# Altium PCB PCB1.PcbDoc
Units mil, origin at the board's own origin, x right, y up, seen from the top; angles counter-clockwise.
Board outline 4180 x 3530 mil, 4 copper layers (Top Layer, Int1 (GND), Int2 (PWR), Bottom Layer), stack 53.912 mil thick; 26 components, 40 nets, 140 pads, 12 vias.
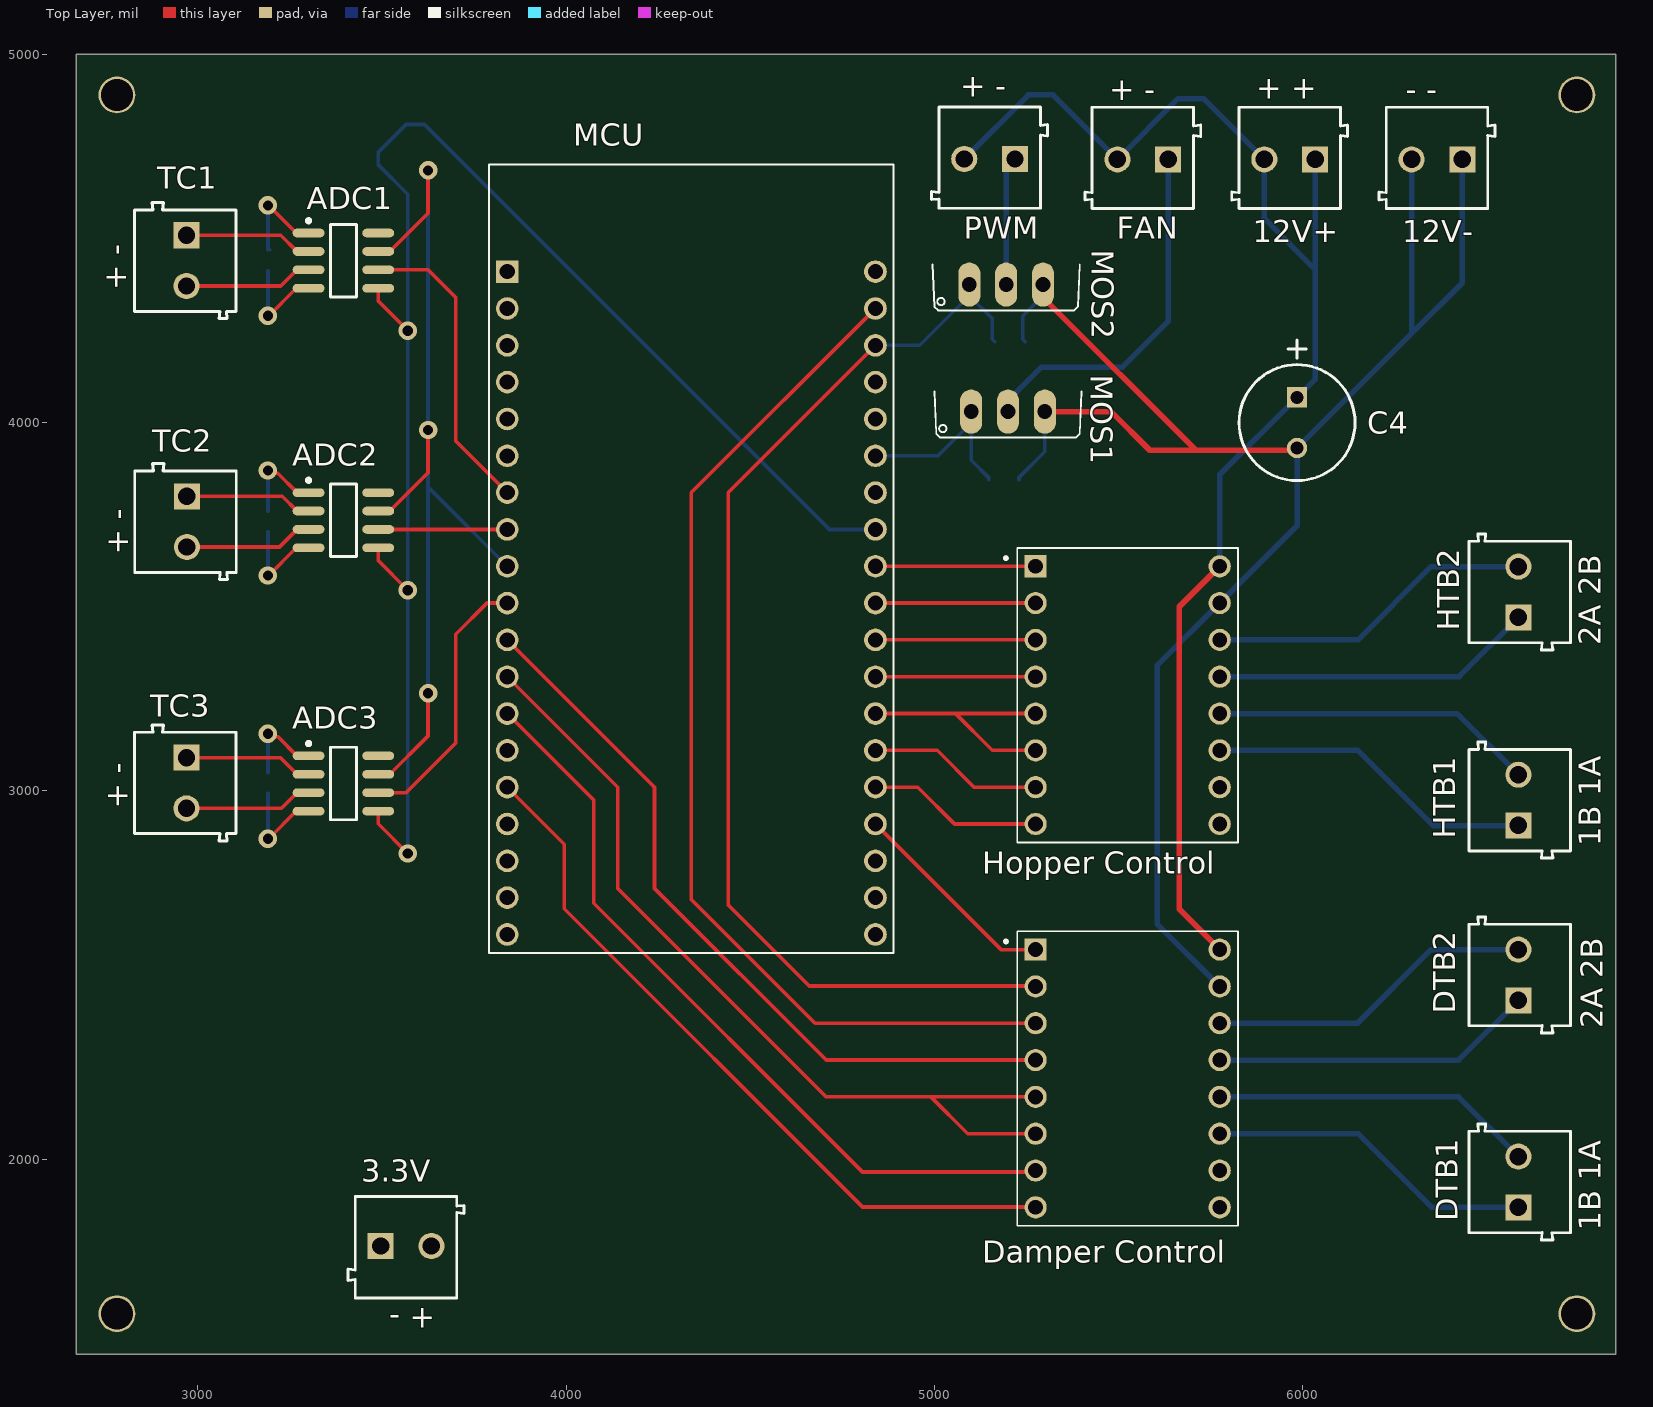
[diagram p0: Top Layer view]
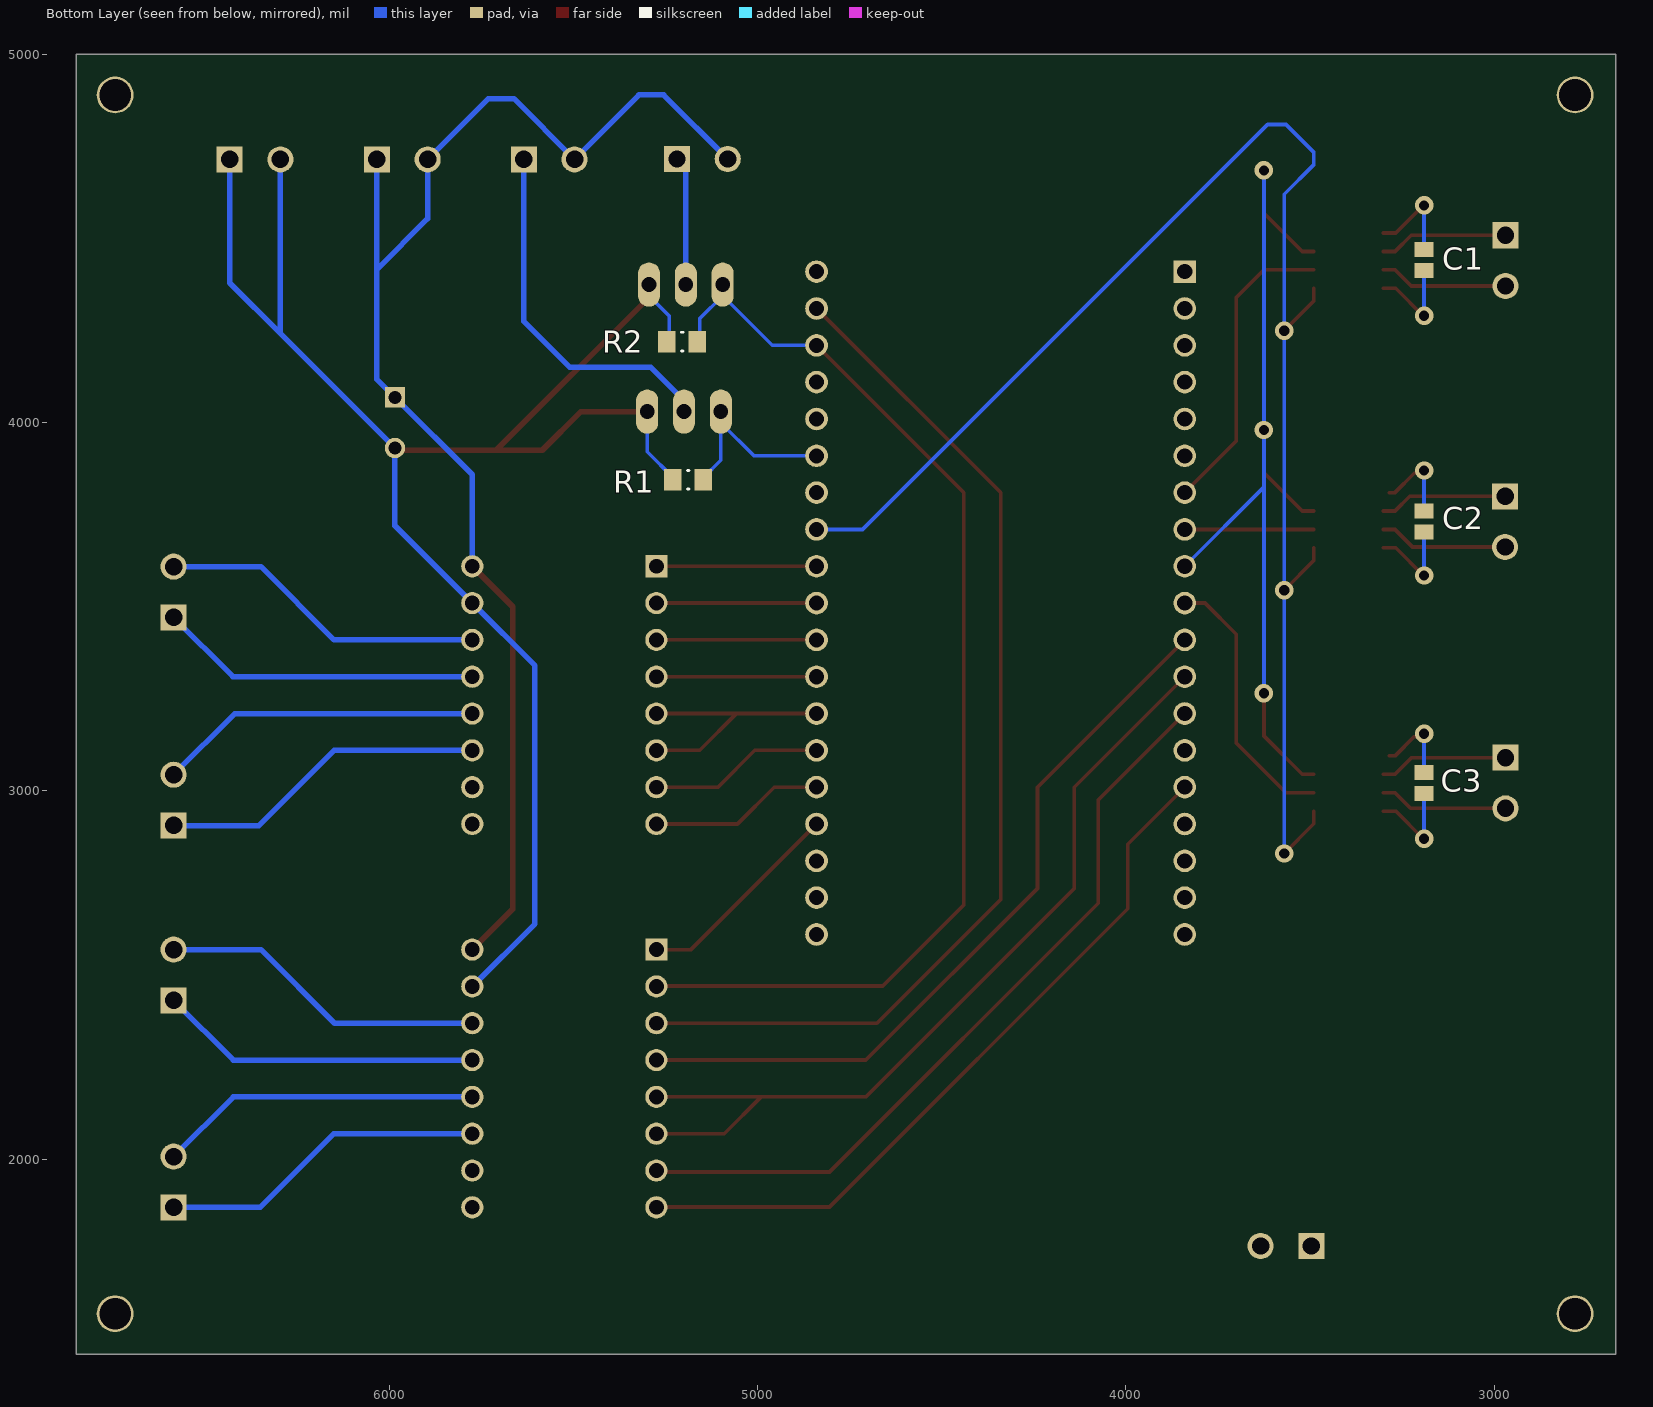
[diagram p1: Bottom Layer view, seen from below]
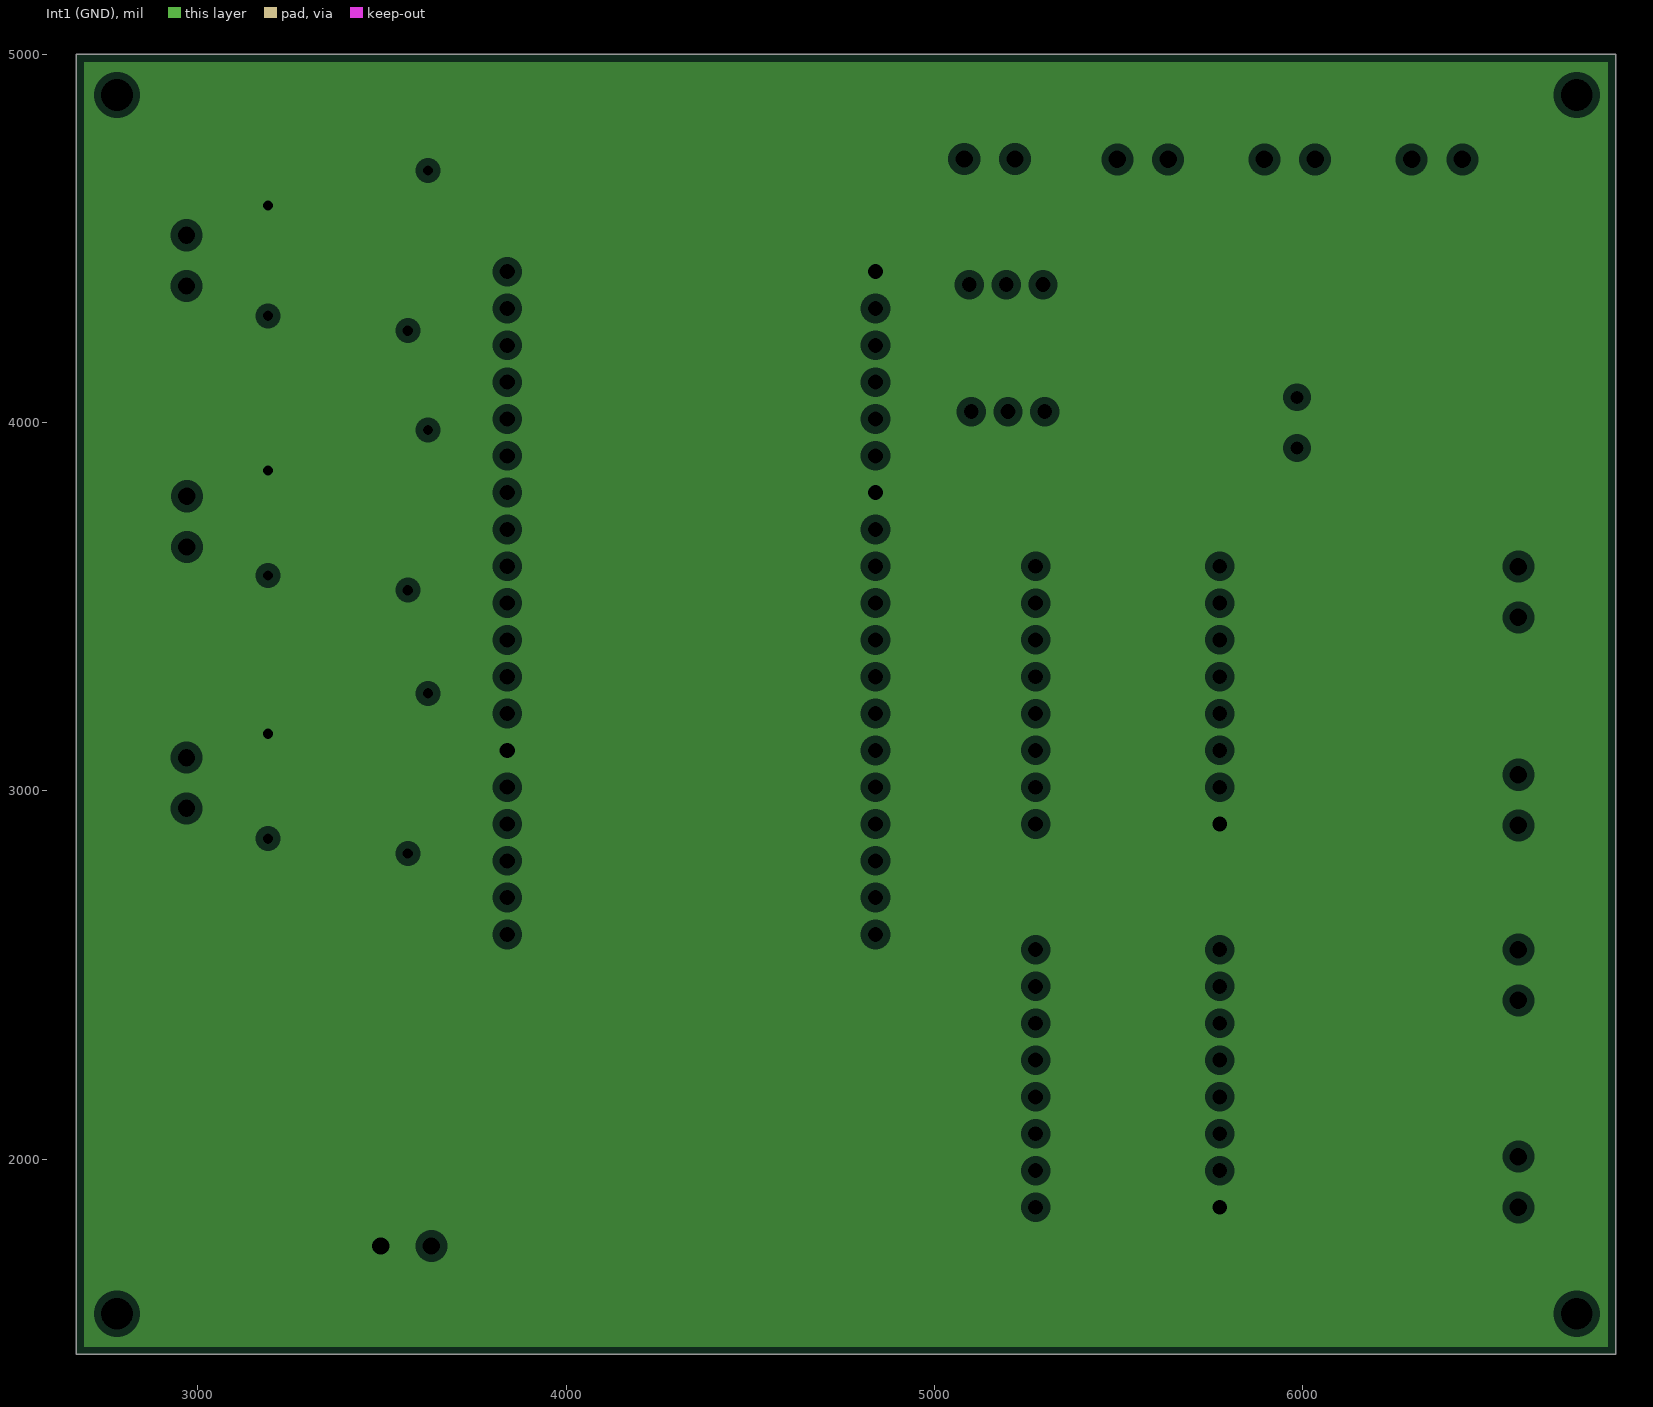
[diagram p2: Int1 (GND), clearances drawn from the general rule]
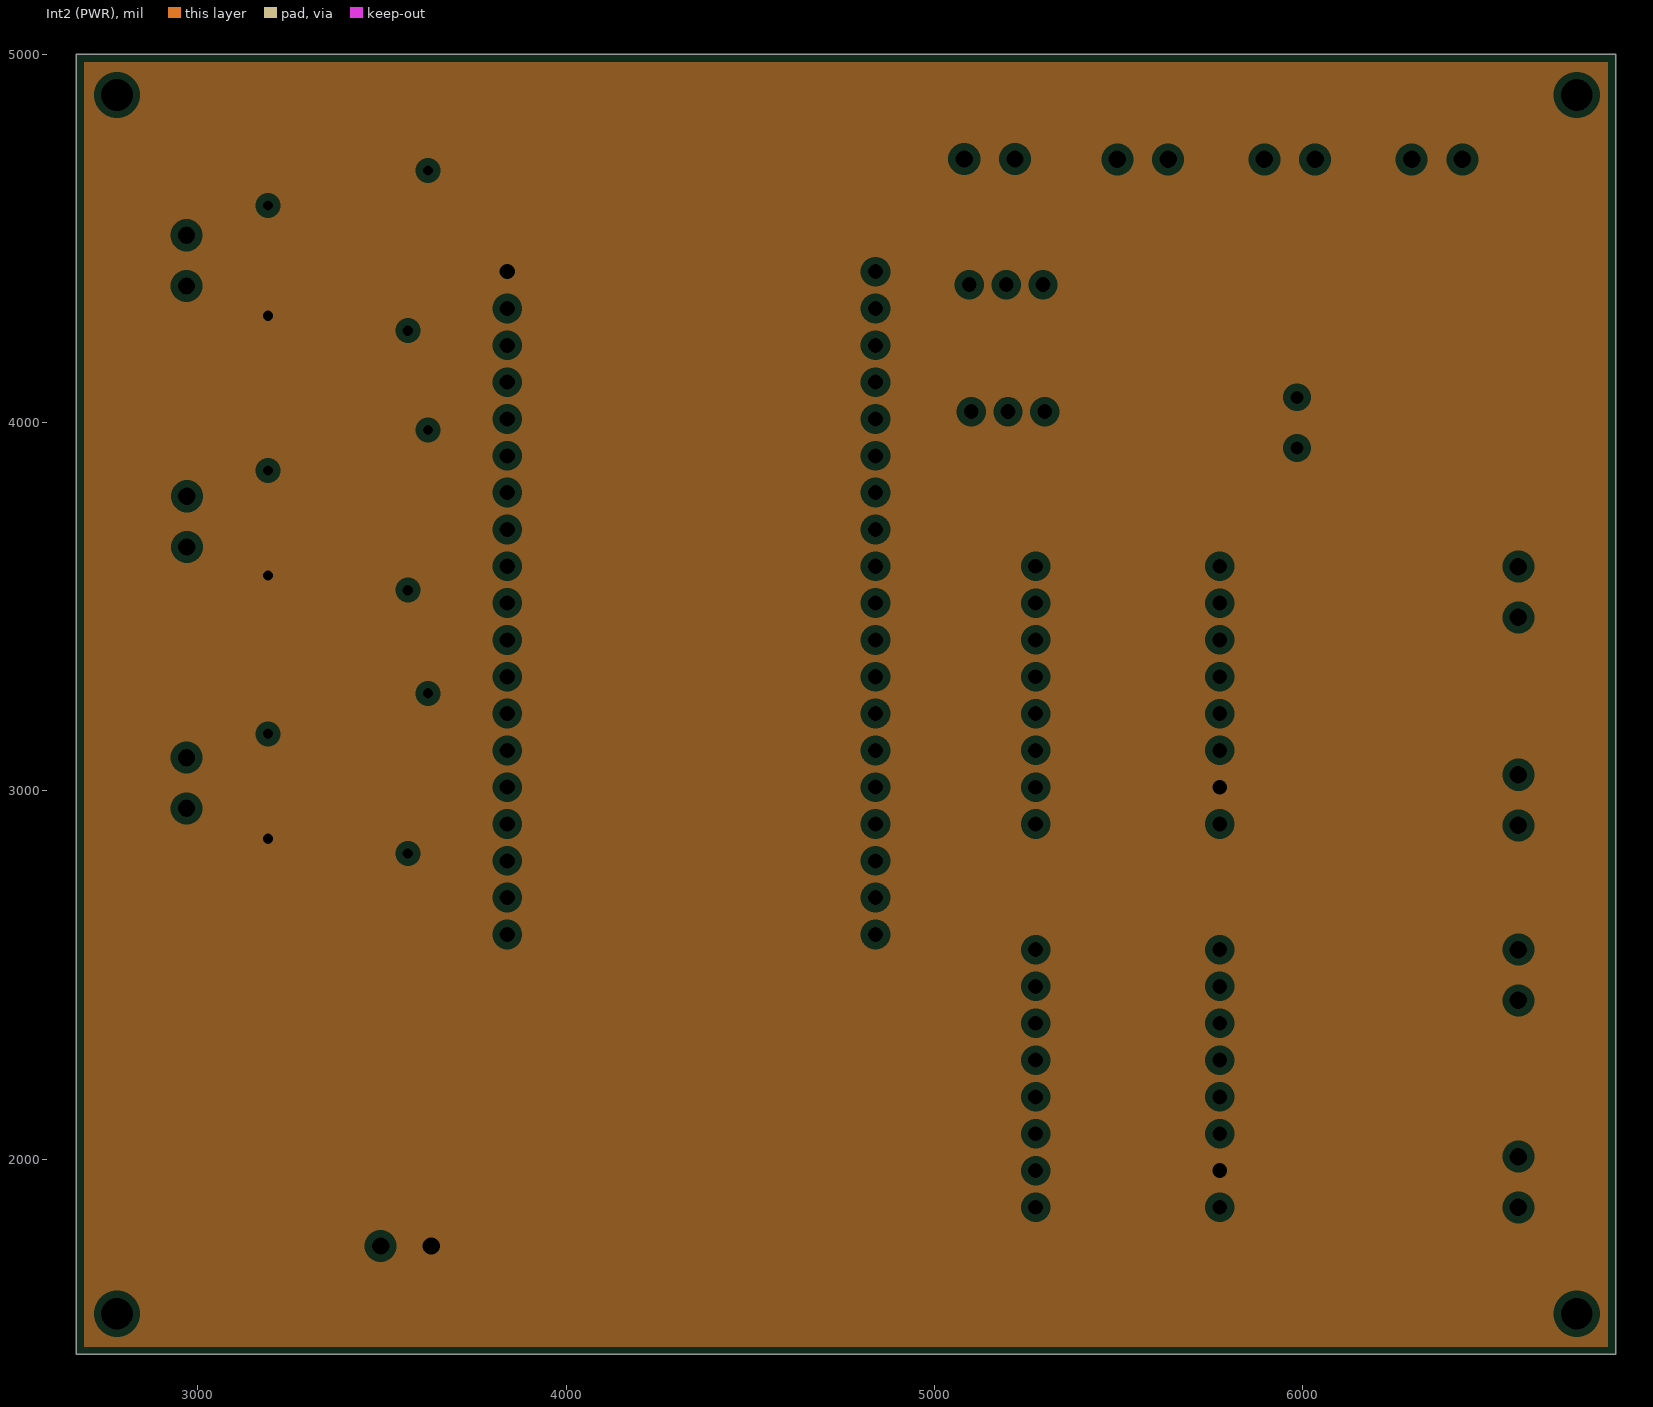
[diagram p3: Int2 (PWR), clearances drawn from the general rule]
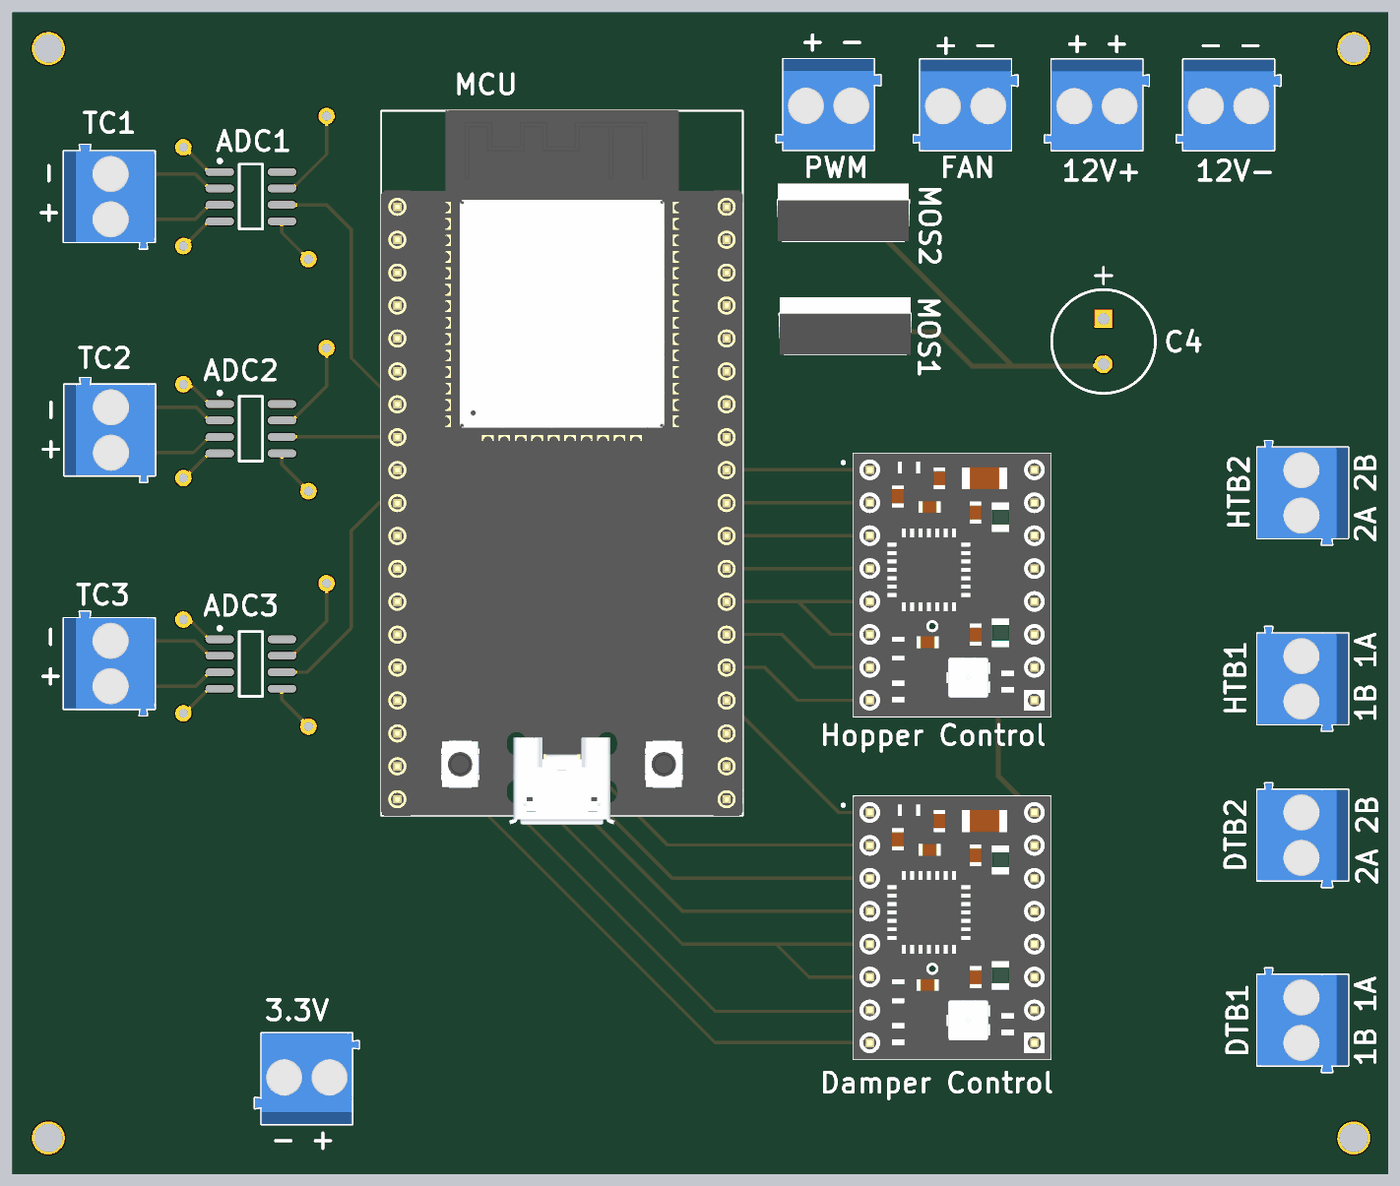
[diagram p4: 3D render of the assembled board from above, using the file's embedded part models]
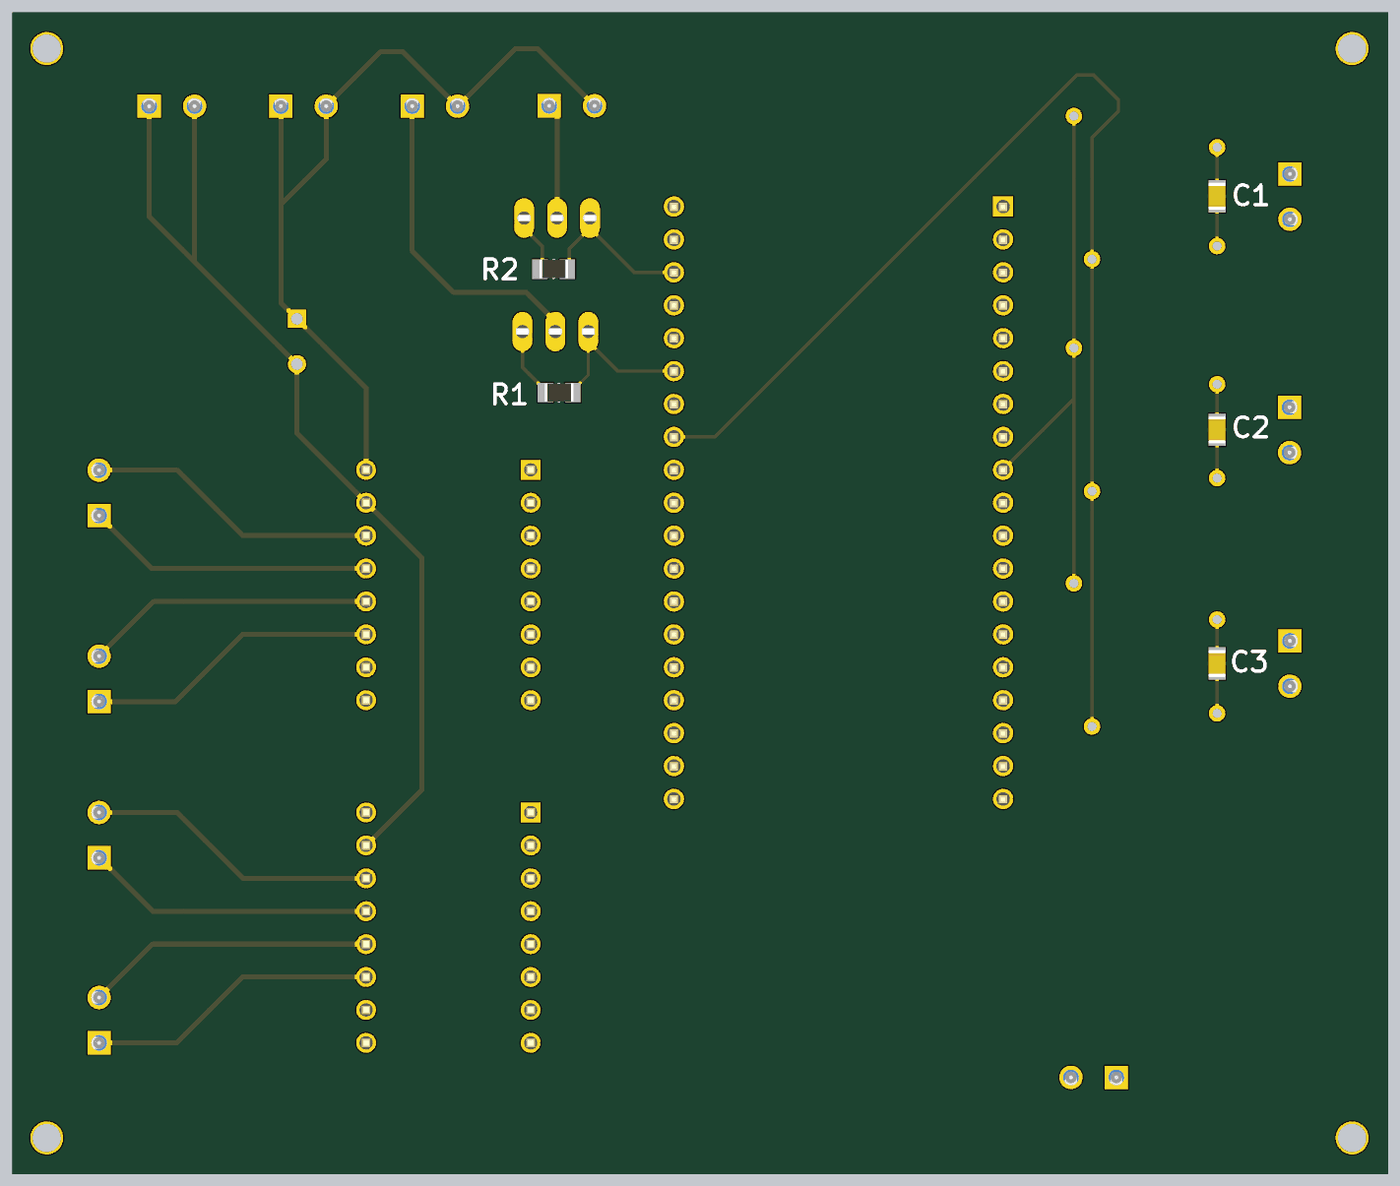
[diagram p5: 3D render of the assembled board from below, using the file's embedded part models]

## Layer stack, top to bottom
Top Solder: solder mask 1, SM-001, Dk 4
Top Layer: signal copper 1.378
Dielectric 1: prepreg 5.1, PP-017, Dk 4.3
Dielectric 2: prepreg 5.1, PP-017, Dk 4.3
Int1 (GND): plane copper 1.378, net GND
Dielectric 3: core 28, Core-039, Dk 4.8
Int2 (PWR): plane copper 1.378, net VCC
Dielectric 4: prepreg 5.1, PP-017, Dk 4.3
Dielectric 5: prepreg 5.1, PP-017, Dk 4.3
Bottom Layer: signal copper 1.378
Bottom Solder: solder mask 1, SM-001, Dk 4

## Board outline
2670,1470 6850,1470 6850,5000 2670,5000

## Design rules (kind name [scope] priority, off if disabled: settings)
Clearance [All] p1: gap=10 ignorepadtopadclearanceinfootprint=FALSE except(0: Arc-Hole Track-Hole SMDPad-Hole THPad-Hole Via-Hole Fill-Hole Poly-Hole Region-Hole Text-Hole)
MinimumSolderMaskSliver [All] p1: minsoldermaskwidth=5
PlaneClearance [All] p1: clearance=20
PlaneConnect [All] p1: planeconnectstyle=Relief reliefexpansion=20 reliefentries=4 reliefconductorwidth=10 reliefairgap=10
PolygonConnect [All] p1: connectstyle=Relief reliefconductorwidth=10 reliefentries=4 polygonreliefangle="90 Angle" airgapwidth=10
RoomDefinition Sheet1 [InComponentClass('Sheet1')] p1: confinementstyle=ConfineIn formatcopy=TRUE lockcomponents=FALSE outline 2355,1350 7315,1350 7315,5180 2355,5180
RoutingVias [All] p1: holewidth=28 width=50 viastyle="Through Hole" minholewidth=28 minwidth=50 maxholewidth=28 maxwidth=50
SilkToSolderMaskClearance [IsPad] p1: minsilkscreentomaskgap=5 clearancetoexposedcopper=TRUE
SolderMaskExpansion [All] p1: expansion=4 istentingtop=FALSE
Width [All] p1: maxlimit=15 minlimit=10 preferedwidth=10 minimp=50.000000 maximp=50.000000 favimp=50.000000
26 further rules are at their usual default settings.

## Components (designator, comment, footprint, x,y, rotation, side; value= is the part's Value field where it differs from the comment)
3.3V "+ -" 691103110002 3565,1760 r0 top
12V+ "+ +" 691103110002 5965,4718.94 r180 top
12V- "- -" 691103110002 6365,4718.94 r180 top
ADC1 "MAX31855KASA+T" MAXM-S8+4_N 3395,4440 r0 top
ADC2 "MAX31855KASA+T" MAXM-S8+4_N 3395,3735 r0 top
ADC3 "MAX31855KASA+T" MAXM-S8+4_N 3395,3020 r0 top
C1 "Capacitor 100 nF +/-10% 50 V 0805" CAPC2013X95X50LL10T25 3190,4441.46 r90 bottom value=100nF
C2 "Capacitor 100 nF +/-10% 50 V 0805" CAPC2013X95X50LL10T25 3190,3731.46 r90 bottom value=100nF
C3 "Capacitor 100 nF +/-10% 50 V 0805" CAPC2013X95X50LL10T25 3190,3021.46 r90 bottom value=100nF
C4 "ECA1HM101" CAPPR65-350-1150X800X1250 5985,4000 r270 top value=100µF
"Damper Control" "A4988_STEPPER_MOTOR_DRIVER_CARRIER_BLACK" MODULE_A4988_STEPPER_MOTOR_DRIVER_CARRIER_BLACK 5525,2218.9 r0 top
DTB1 "1B 1A" 691103110002 6590,1937.8 r90 top
DTB2 "2A 2B" 691103110002 6590,2500 r90 top
FAN "+ -" 691103110002 5566.1,4718.94 r180 top
"Hopper Control" "A4988_STEPPER_MOTOR_DRIVER_CARRIER_BLACK" MODULE_A4988_STEPPER_MOTOR_DRIVER_CARRIER_BLACK 5525,3260 r0 top
HTB1 "1B 1A" 691103110002 6590,2975 r90 top
HTB2 "2A 2B" 691103110002 6590,3540 r90 top
MCU "ESP32-DEVKITC-32D" MODULE_ESP32-DEVKITC-32D 4340,3632.05 r0 top
MOS1 "FQP30N06L" TO220V 5200,4130 r0 top
MOS2 "FQP30N06L" TO220V 5195,4475 r0 top
PWM "+ -" 691103110002 5150,4720 r180 top
R1 "Resistor 10k +/-1% 0805 125 mW" RESC2013X50X35ML15T15 5188.66,3845 r0 bottom value=10k
R2 "Resistor 10k +/-1% 0805 125 mW" RESC2013X50X35ML15T15 5205,4220 r0 bottom value=10k
TC1 "+ -" 691103110002 2965,4440 r270 top
TC2 "+ -" 691103110002 2966.06,3731.1 r270 top
TC3 "+ -" 691103110002 2965,3021.46 r270 top

## Footprints (in the part's own frame and the unit in brackets; to place one, negate y for a bottom-side part, rotate by r counter-clockwise, add the part's x,y. Pads: shape width x height; smd on the part's side, far side on the other; paste and mask are expansions set on the pad)
691103110002 [mm] "3,50mm - modular - blue - Horizontal wire entry - Pressure clamp - 8,4mm height - 02p"
  rect 1.8x1.8 hole 1.2: 1(-1.75,0.1)
  round 1.8 hole 1.2: 2(1.75,0.1)
  silkscreen extent -4,-3.5 4,3.5, body extent -4,-3.5 4,3.5, height 8.45
CAPC2013X95X50LL10T25 [mm] "Chip Capacitor, 2-Leads, Body 2.10x1.35mm, IPC High Density"
  rect 1.05x1.3 smd: 1(-0.725,0) 2(0.725,0)
  body extent -1.05,-0.67 1.05,0.67, height 0.95
CAPPR65-350-1150X800X1250 [mm] "THD, 2-Leads, Dia 8mm, Pin Spacing 3.5mm"
  rect 1.4x1.4 hole 0.9: 1(-1.75,0)
  round 1.4 hole 0.9: 2(1.75,0)
  silkscreen extent -5.71,-4 4,4, body extent -4,-4 3.95,4, height 12.5
MAXM-S8+4_N [mm] "SOIC, 8-Leads, Body 4.9x3.9mm, Pitch 1.27mm, IPC Medium Density"
  oval 2.2x0.6 smd: 1(-2.4,1.905) 2(-2.4,0.635) 3(-2.4,-0.635) 4(-2.4,-1.905) 5(2.4,-1.905) 6(2.4,-0.635) 7(2.4,0.635) 8(2.4,1.905)
  silkscreen extent -2.52,-2.5 0.9,2.88, body extent -2,-2.5 2,2.5, height 1.75
MODULE_A4988_STEPPER_MOTOR_DRIVER_CARRIER_BLACK [mm]
  rect 1.53x1.53 hole 1.02: 1(-6.35,8.89)
  round 1.53 hole 1.02: 2(-6.35,6.35) 3(-6.35,3.81) 4(-6.35,1.27) 5(-6.35,-1.27) 6(-6.35,-3.81) 7(-6.35,-6.35) 8(-6.35,-8.89) 9(6.35,-8.89) 10(6.35,-6.35) 11(6.35,-3.81) 12(6.35,-1.27) 13(6.35,1.27) 14(6.35,3.81) 15(6.35,6.35) 16(6.35,8.89)
  silkscreen extent -8.5,-10.16 7.62,10.16, body extent -7.62,-10.16 7.62,10.16, height 5.89
MODULE_ESP32-DEVKITC-32D [mm]
  rect 1.56x1.56 hole 1.04: 1(-12.7,19.76)
  round 1.56 hole 1.04: 2(-12.7,17.22) 3(-12.7,14.68) 4(-12.7,12.14) 5(-12.7,9.6) 6(-12.7,7.06) 7(-12.7,4.52) 8(-12.7,1.98) 9(-12.7,-0.56) 10(-12.7,-3.1) 11(-12.7,-5.64) 12(-12.7,-8.18) 13(-12.7,-10.72) 14(-12.7,-13.26) 15(-12.7,-15.8) 16(-12.7,-18.34) 17(-12.7,-20.88) 18(-12.7,-23.42) 19(-12.7,-25.96) 20(12.7,19.76) 21(12.7,17.22) 22(12.7,14.68) 23(12.7,12.14) 24(12.7,9.6) 25(12.7,7.06) 26(12.7,4.52) 27(12.7,1.98) 28(12.7,-0.56) 29(12.7,-3.1) 30(12.7,-5.64) 31(12.7,-8.18) 32(12.7,-10.72) 33(12.7,-13.26) 34(12.7,-15.8) 35(12.7,-18.34) 36(12.7,-20.88) 37(12.7,-23.42) 38(12.7,-25.96)
  silkscreen extent -13.95,-27.25 13.95,27.15, body extent -13.97,-27.92 13.97,27.18, height 6.7
RESC2013X50X35ML15T15 [mm] "Chip Resistor, 2-Leads, Body 2.2x1.4mm, IPC Low Density"
  rect 1.2x1.5 smd: 1(-1.05,0) 2(1.05,0)
  silkscreen extent -0.05,-0.65 0.05,0.65, body extent -1.1,-0.7 1.1,0.7, height 0.5
TO220V [mil]
  oval 60x120 hole 40: 1(-100,-100) 2(0,-100) 3(100,-100)
  silkscreen extent -200,-170 200,-45, body extent -199,-170 199,4, height 781

## Part data
3.3V 12V+ 12V- DTB1 DTB2 FAN HTB1 HTB2 PWM TC1 TC2 TC3: library part CMP-1502-03254-1, "Series 1031 - 3.50 mm Horizontal Entry Modular with Pressure Clamp WR-TBL, 2 pin", Manufacturer="Wurth Elektronik", Operating Temperature=-40to105degC, Package Reference=691103110002, Datasheet URL=http://katalog.we-online.de/em/datasheet/6911031100xx.pdf, Manufacturer URL=http://www.we-online.de, Mounting Technology=THT, Packaging=Box, Part Number=691103110002, Pin Number=2, Pitch=3.50mm, Publisher=WurthElektronik
ADC1 ADC2 ADC3: "Cold Junction Compensated Thermocouple to Digital Converter, 14 Bits Temperature Resolution, -40 to 125 degC, 8-Pin SOIC (S8+4), Pb-Free, Tape ang Reel", Generic Part Number=MAX31855, Supplier Part Number 1=MAX31855KASA+TTR-ND, Code_JEDEC=MS-012, ComponentLink1Description="Manufacturer URL", ComponentLink1URL=http://www.maximintegrated.com/, ComponentLink2Description=Datasheet, ComponentLink2URL=http://datasheets.maximintegrated.com/en/ds/MAX31855.pdf, ComponentLink3Description="Package Specification", ComponentLink3URL=http://pdfserv.maximintegrated.com/package_dwgs/21-0041.PDF, DatasheetVersion="Rev. 2", Functions="Thermocouple-to-Digital Converter", Interface=SPI, Mounting Technology="Surface Mount", PackageDescription="8-Pin Small-Outline IC, Narrow, Body 3.9 x 4.9 mm, Pitch 1.27 mm", PackageReference=S8+4, PackageVersion="Rev. D, 10/2012", Packing="Tape ang Reel", Parasite Pwr.=No, PartNumber=MAX31855KASA+T, Supplier 1=Digi-Key, Supplier 2=Digi-Key, Supplier 3=Digi-Key, Supplier 4=Mouser, Supplier Part Number 2=MAX31855KASA+TCT-ND, Supplier Part Number 3=MAX31855KASA+TDKR-ND, Supplier Part Number 4=700-MAX31855KASA+T
C1 C2 C3: library part CMP-001-00018-6, "Chip Capacitor, 100 nF, +/- 10%, 50 V, 0805 (2012 Metric)", Capacitor Type=Ceramic, Case/Package=0805, Max Operating Temperature=125°C, Min Operating Temperature=-55°C, Tolerance=10%, Voltage Rating=50V, Mounting Technology=SM, Pins=2, RoHS Compliant=True
C4: library part CMP-001-00026-7, "Aluminum Electrolytic Capacitor, 100 uF, +/- 20%, 50 V, -40 to 85 degC, 2-Pin THD, RoHS, Bulk", Capacitor Type=Electrolytic, Case/Package=Radial, Manufacturer=Panasonic, Max Operating Temperature=85°C, Min Operating Temperature=-40°C, Package Description="2-Pin Radial Lead, Dia 8 mm, Height 12.5 mm", Package Quantity=200, Package Reference=CAPPR65-350-1150X800X1250, Ripple Current=250mA, Tolerance=20%, Voltage Rating=50V, Datasheet URL=https://industrial.panasonic.com/cdbs/www-data/pdf/RDF0000/ABA0000C1218.pdf, Datasheet Version="Rev. 05, 10/2016", Diameter=8mm, Lead Pitch=3.5mm, Manufacturer URL=http://www.panasonic.com/, Mounting Technology=TH, Packaging=Bulk, Pins=2, Ripple Current (AC)=250mA, RoHS Compliant=True
"Damper Control" "Hopper Control": "Stepper motor controler; IC: A4988; 1A; Uin mot: 8Ã·35V", Package=None, Availability=Unavailable, MF="{'manufacturer': u'Pololu'}", MP=A4988_STEPPER_MOTOR_DRIVER_CARRIER_BLACK, Price=None
MCU: "Eval Board For Esp-Wroom-32", Package=None, Availability=Unavailable, MF="{'manufacturer': u'Espressif Systems'}", MP=ESP32-DEVKITC-32D, Price=None
MOS1 MOS2: "<b>N-Channel QFETÂ® MOSFET</b> <p>Source: <a href https://www.fairchildsemi.com/datasheets/FQ/FQP30N06L.pdf>Data Sheet </href>", Package=None, Availability=Unavailable, MF="{'manufacturer': u'ON Semiconductor'}", MP=FQP30N06L, Price=None
R1 R2: library part CMP-009-00018-5, "Chip Resistor, 10 KOhm, +/- 1%, 125 mW, -55 to 155 degC, 0805 (2012 Metric)", Case/Package=0805, Max Operating Temperature=155°C, Min Operating Temperature=-55°C, Power=125mW, Tolerance=1%, Voltage Rating=150V, Mounting Technology=SM, Pins=2, RoHS Compliant=True

## Free pads (board coordinates)
  round 100 hole 86: 2(2780,1580) 2(2780,4890) 2(6745,1580) 2(6745,4890)

## Via types
v1: diameter 50, hole 28, Top Layer to Bottom Layer, 12 vias

## Nets (pads, with @x,y where several pads share a name; then routed paths per layer and width w, separated by ;. In a path a pad name is that pad's centre, name@x,y a point inside that pad or via, vN(x,y) a via of type N, cw(c..) or ccw(c..) an arc to the next point about the centre after c; other vN are vias at no path point)
GND: 3.3V.1 "Damper Control.9" "Hopper Control.9" ADC1.1 ADC2.1 ADC3.1 C1.2 C2.2 C3.2 MCU.14 MCU.20 MCU.26 | length 734
  Top Layer w10: v1(3190,3155) 3197.65,3147.35 3216.67,3147.35 3269.02,3095 ADC3.1@3284.76,3095 ; v1(3190,3870) 3197.65,3862.35 3216.67,3862.35 3269.02,3810 ADC2.1@3284.76,3810 ; v1(3190,4590) 3192.01,4590 3267.01,4515 ADC1.1
  Bottom Layer w10: C3.2 v1(3190,3155) ; C2.2 v1(3190,3870) ; v1(3190,4590) C1.2 C1.2@3194.92,4470 ; 5775,2910 5788.27,2910
Net12V+_1: 12V+.1 12V+.2 "Damper Control.16" "Hopper Control.16" C4.1 FAN.2 PWM.2 | length 3796.4
  Top Layer w15: 5775,2568.9 5665,2678.9 5665,3500 5775,3610
  Bottom Layer w15: PWM.2 5255.04,4890 5322.2,4890 FAN.2 5662.2,4880 5731.1,4880 12V+.2 5896.1,4554.19 6033.9,4416.4 ; 5775,3610 5775,3858.9 C4.1 6033.9,4117.8 6033.9,4416.4 ; 12V+.1 6033.9,4416.4
Net12V-_1: 12V-.1 12V-.2 "Damper Control.15" "Hopper Control.15" C4.2 MOS1.3 MOS2.3 R1.2 R2.2 | length 4887
  Top Layer w10: MOS2.3@5295,4340 MOS2.3 ; C4.2@5978.9,3925 C4.2
  Top Layer w15: MOS2.3@5295,4340 5710,3925 ; MOS1.3 5480,4030 5585,3925 5710,3925 ; C4.2@5978.9,3925 5710,3925
  Bottom Layer w10: R1.2 5230,3850.91 5300,3920.91 MOS1.3 MOS1.3@5305,4025 ; R2.2 5240,4226.34 5240,4290 5295,4345 MOS2.3
  Bottom Layer w15: 5775,2468.9 5605,2638.9 5605,3340 5775,3510 5985,3720 C4.2 6296.1,4242.2 ; 12V-.2 6296.1,4242.2 ; 12V-.1 6433.9,4380 6296.1,4242.2
NetADC1_2: ADC1.2 TC1.1 | length 349.8
  Top Layer w10: TC1.1 3225.12,4508.9 3269.02,4465 ADC1.2
NetADC1_3: ADC1.3 TC1.2 | length 349.8
  Top Layer w10: TC1.2 3225.12,4371.1 3269.02,4415 ADC1.3
NetADC1_5: ADC1.5 ADC2.5 ADC3.5 MCU.27 | length 4230.7
  Top Layer w10: ADC3.5 3489.49,2910.51 v1(3570,2830) ; ADC2.5 3489.49,3625.51 v1(3570,3545) ; ADC1.5 3489.49,4330.51 v1(3570,4250)
  Bottom Layer w10: v1@3577.65,2822.35 v1(3570,2830) v1(3570,3545) v1(3570,4250) 3570,4620 3490,4700 3490,4735 3565,4810 3615,4810 4715,3710 MCU.27
NetADC1_6: ADC1.6 MCU.7 | length 829.6
  Top Layer w10: ADC1.6 3625,4415 3700,4340 3700,3950 MCU.7
NetADC1_7: ADC1.7 ADC2.7 ADC3.7 MCU.9 | length 2607.8
  Top Layer w10: ADC3.7 3520.98,3045 3625,3149.02 v1(3625,3265) ; ADC2.7 3520.98,3760 3625,3864.02 v1(3625,3980) ; ADC1.7 3520.98,4465 3625,4569.02 v1(3625,4685)
  Bottom Layer w10: v1(3625,3265) 3625,3825 ; v1(3625,4685) v1(3625,3980) 3625,3825 ; MCU.9 3625,3825
NetADC2_2: ADC2.2 TC2.1 | length 347.1
  Top Layer w10: TC2.1 3229.02,3800 3269.02,3760 ADC2.2
NetADC2_3: ADC2.3 TC2.2 | length 350.3
  Top Layer w10: TC2.2 3221.22,3662.2 3269.02,3710 ADC2.3
NetADC2_6: ADC2.6 MCU.8 | length 350.5
  Top Layer w10: ADC2.6 MCU.8
NetADC3_2: ADC3.2 TC3.1 | length 350.4
  Top Layer w10: TC3.1 3223.66,3090.35 3269.02,3045 ADC3.2
NetADC3_3: ADC3.3 TC3.2 | length 349.2
  Top Layer w10: TC3.2 3226.57,2952.56 3269.02,2995 ADC3.3
NetADC3_6: ADC3.6 MCU.10 | length 736.6
  Top Layer w10: ADC3.6 3565,2995 3700,3130 3700,3425 3785,3510 MCU.10
"NetDamper Control_1": "Damper Control.1" MCU.35 | length 576.3
  Top Layer w10: MCU.35 5181.1,2568.9 5275,2568.9
"NetDamper Control_2": "Damper Control.2" MCU.22 MOS2.1 R2.1 | length 3106.6
  Top Layer w10: MCU.22 4440,3810 4440,2690 4660,2470 5273.9,2470 5275,2468.9
  Bottom Layer w10: MCU.22 4960,4210 MOS2.1@5095,4345 ; MOS2.1 MOS2.1@5095,4345 ; R2.1 5157.32,4226.34 5157.32,4282.68 MOS2.1@5095,4345
"NetDamper Control_3": "Damper Control.3" MCU.21 | length 2886.3
  Top Layer w10: MCU.21 4340,3810 4340,2705 4676.1,2368.9 5275,2368.9
"NetDamper Control_4": "Damper Control.4" MCU.11 | length 2068.8
  Top Layer w10: MCU.11 4240,3010 4240,2735 4706.1,2268.9 5275,2268.9
"NetDamper Control_5": "Damper Control.5" "Damper Control.6" MCU.12 | length 2397.7
  Top Layer w10: MCU.12 4140,3010 4140,2735 4706.1,2168.9 4990.55,2168.9 ; 5273.9,2070 5275,2068.9 5090.55,2068.9 4990.55,2168.9 ; 5273.9,2170 5275,2168.9 4990.55,2168.9
"NetDamper Control_7": "Damper Control.7" MCU.13 | length 2116.3
  Top Layer w10: MCU.13 4075,2975 4075,2695 4805,1965 5271.1,1965 5275,1968.9
"NetDamper Control_8": "Damper Control.8" MCU.15 | length 2010.2
  Top Layer w10: MCU.15 3995,2855 3995,2680 4805,1870 5273.9,1870 5275,1868.9
"NetDamper Control_11": "Damper Control.11" DTB1.1 | length 893.9
  Bottom Layer w15: 5775,2068.9 6151.1,2068.9 6351.1,1868.9 DTB1.1
"NetDamper Control_12": "Damper Control.12" DTB1.2 | length 878.3
  Bottom Layer w15: 5775,2168.9 6423.86,2168.9 DTB1.2
"NetDamper Control_13": "Damper Control.13" DTB2.1 | length 878.3
  Bottom Layer w15: 5775,2268.9 6423.86,2268.9 DTB2.1
"NetDamper Control_14": "Damper Control.14" DTB2.2 | length 893.9
  Bottom Layer w15: 5775,2368.9 6148.9,2368.9 6348.9,2568.9 DTB2.2
NetFAN_1: FAN.1 MOS1.2 | length 1007.6
  Bottom Layer w10: MOS1.2@5200,4060 MOS1.2 MOS1.2@5209.57,4039.57
  Bottom Layer w15: MOS1.2@5200,4060 5290,4150 5510,4150 5635,4275 FAN.1
"NetHopper Control_1": "Hopper Control.1" MCU.28 | length 435
  Top Layer w10: MCU.28 5275,3610
"NetHopper Control_2": "Hopper Control.2" MCU.29 | length 435
  Top Layer w10: MCU.29 5275,3510
"NetHopper Control_3": "Hopper Control.3" MCU.30 | length 435
  Top Layer w10: MCU.30 5275,3410
"NetHopper Control_4": "Hopper Control.4" MCU.31 | length 435
  Top Layer w10: MCU.31 5275,3310
"NetHopper Control_5": "Hopper Control.5" "Hopper Control.6" MCU.32 | length 693.9
  Top Layer w10: MCU.32 5057.5,3210 ; 5275,3110 5157.5,3110 5057.5,3210 ; 5275,3210 5057.5,3210
"NetHopper Control_7": "Hopper Control.7" MCU.33 | length 476.4
  Top Layer w10: MCU.33 5007.66,3110 5107.66,3010 5275,3010
"NetHopper Control_8": "Hopper Control.8" MCU.34 | length 476.4
  Top Layer w10: MCU.34 4955,3010 5055,2910 5275,2910
"NetHopper Control_11": "Hopper Control.11" HTB1.1 | length 896.4
  Bottom Layer w10: HTB1.1@6584.96,2905 HTB1.1
  Bottom Layer w15: 5775,3110 6150,3110 6355,2905 HTB1.1@6584.96,2905
"NetHopper Control_12": "Hopper Control.12" HTB1.2 | length 879.9
  Bottom Layer w15: 5775,3210 6419.96,3210 HTB1.2
"NetHopper Control_13": "Hopper Control.13" HTB2.1 | length 877.8
  Bottom Layer w15: 5775,3310 6424.96,3310 HTB2.1
"NetHopper Control_14": "Hopper Control.14" HTB2.2 | length 893.4
  Bottom Layer w15: 5775,3410 6150,3410 6348.9,3608.9 HTB2.2
NetMCU_25: MCU.25 MOS1.1 R1.1 | length 501.9
  Bottom Layer w10: MCU.25 5010,3910 MOS1.1@5100,4000 ; MOS1.1 MOS1.1@5100,4000 ; R1.1 5147.32,3850.91 5100,3898.23 MOS1.1@5100,4000
NetMOS2_2: MOS2.2 PWM.1 | length 351
  Bottom Layer w10: PWM.1@5195,4692.17 PWM.1
  Bottom Layer w15: MOS2.2 PWM.1@5195,4692.17
VCC: 3.3V.2 "Damper Control.10" "Hopper Control.10" ADC1.4 ADC2.4 ADC3.4 C1.1 C2.1 C3.1 MCU.1 | length 788.5
  Top Layer w10: v1(3190,2870) 3192.01,2870 3267.01,2945 ADC3.4 ; v1(3190,3585) 3192.01,3585 3267.01,3660 ADC2.4 ; v1(3190,4290) 3192.01,4290 3267.01,4365 ADC1.4
  Bottom Layer w10: v1(3190,2870) C3.1 ; v1(3190,3585) C2.1 ; v1(3190,4290) C1.1
pads on no net: ADC1.8 ADC2.8 ADC3.8 MCU.2 MCU.3 MCU.4 MCU.5 MCU.6 MCU.16 MCU.17 MCU.18 MCU.19 MCU.23 MCU.24 MCU.36 MCU.37 MCU.38

## Polygon pours and split planes (outlines as drawn)
GND on Int1 (GND) (split plane): 6829.9,1490.1 2690.1,1490.1 2690.1,4979.9 6829.9,4979.9
VCC on Int2 (PWR) (split plane): 6829.9,1490.1 2690.1,1490.1 2690.1,4979.9 6829.9,4979.9

## Text inside footprints (layer, text, board x,y; h text height)
MOS1: Mechanical 13 "3" at 5275.06,4004.9 h50.04; Mechanical 13 "2" at 5174.97,4004.83 h50.07; Mechanical 13 "1" at 5074.75,4004.75 h50.1
MOS2: Mechanical 13 "3" at 5270.06,4349.9 h50.04; Mechanical 13 "2" at 5169.97,4349.83 h50.07; Mechanical 13 "1" at 5069.75,4349.75 h50.1